# Altium PCB mt-kugreen-01.PcbDoc (part 2 of 2)
Units mm, origin at the board's own origin, x right, y up, seen from the top; angles counter-clockwise.
Board outline 84.8 x 48.4 mm, 2 copper layers (Top Layer, Bottom Layer); 75 components, 51 nets, 296 pads, 97 vias.
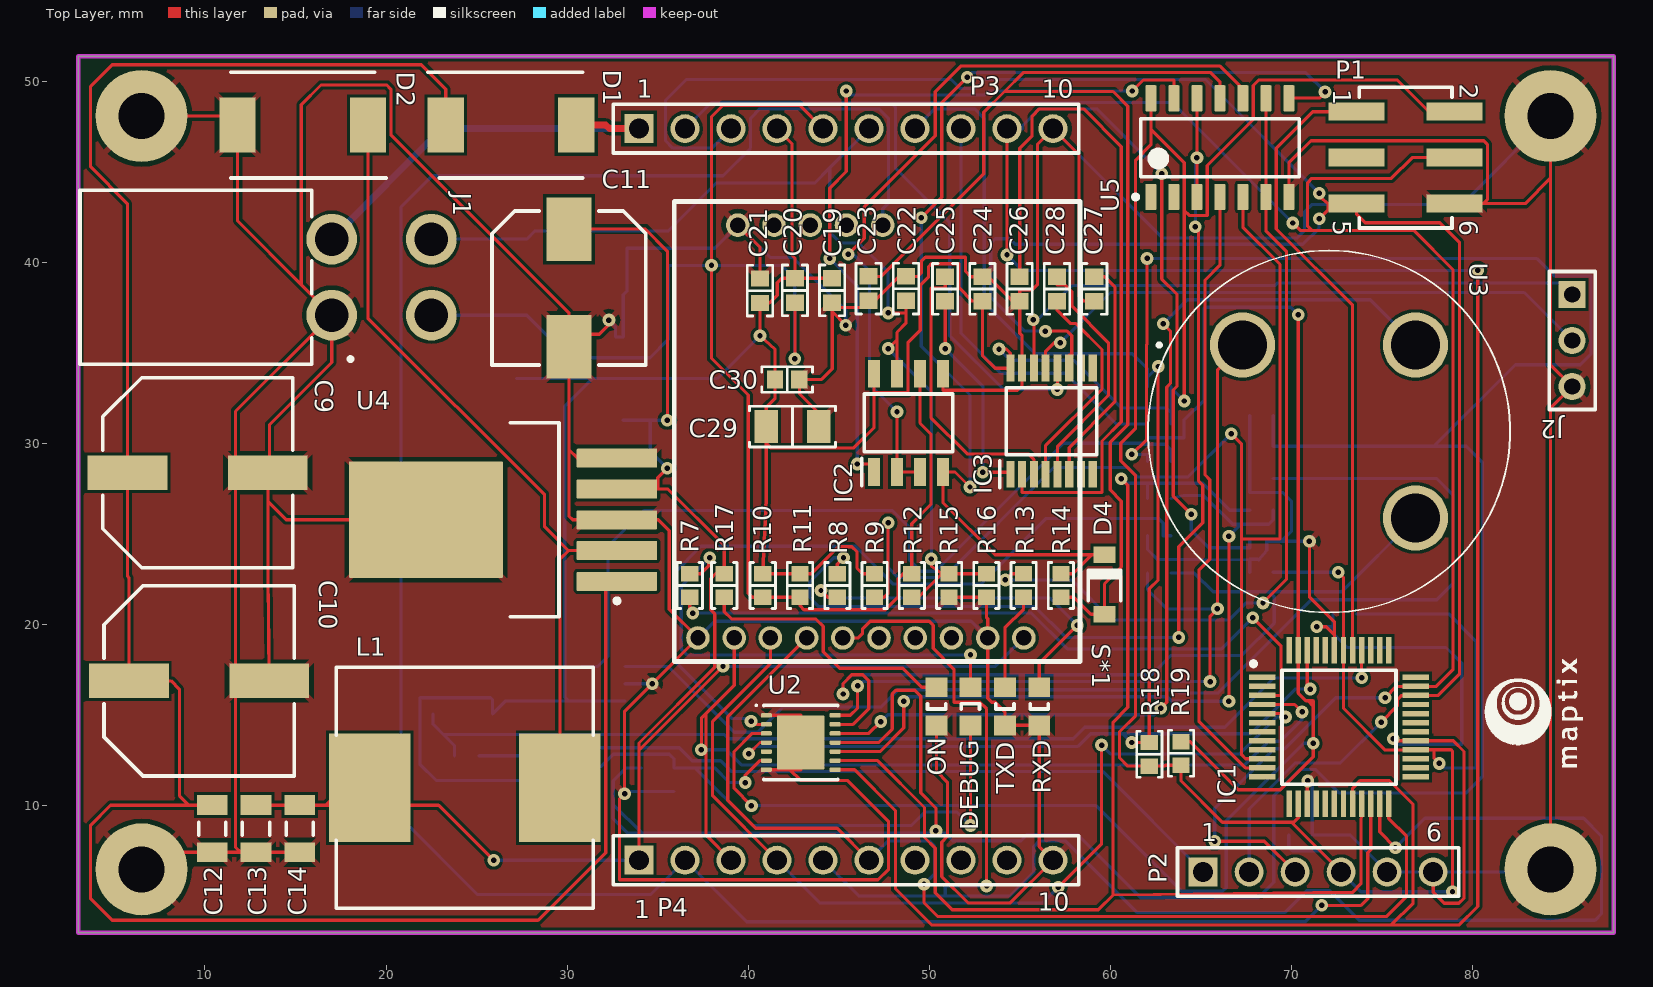
[diagram p0: Top Layer view]

## Via types
v1: diameter 0.7, hole 0.3, Top Layer to Bottom Layer, 97 vias

## Nets (pads, with @x,y where several pads share a name; then routed paths per layer and width w, separated by ;. In a path a pad name is that pad's centre, name@x,y a point inside that pad or via, vN(x,y) a via of type N, cw(c..) or ccw(c..) an arc to the next point about the centre after c; other vN are vias at no path point) (continued)
NetU2_12: (continued)
  Bottom Layer w0.178: v1(47.32,14.656) 47.701,15.037 62.433,15.037 v1(62.789,15.392) ; v1(62.916,36.627) 64.237,37.948 74.352,37.948 U3.2
RS232_RXD: IC3.14 J2.1 | length 33.5
  Top Layer w0.178: v1(55.744,36.852) 55.775,36.821 IC3.14
  Bottom Layer w0.178: v1(55.744,36.852) 55.977,36.852 57.86,38.735 69.081,38.735 69.215,38.869 84.871,38.869 J2.1
RS232_TXD: IC3.13 J2.2 | length 32.4
  Top Layer w0.178: IC3.13 56.425,35.114 56.896,35.585 v1(57.238,35.585)
  Bottom Layer w0.178: v1(57.238,35.585) 60.006,38.354 82.846,38.354 J2.2
SCL: IC1.47 P3.8 R2.1 R19.2 U2.3 | length 118.2
  Top Layer w0.178: v1(40.178,10.015) 39.22,10.973 39.22,13.005 40.215,14 U2.3 ; R19.2 64.414,13.55 67.068,10.897 69.393,10.897 71.203,12.707 v1(71.203,13.456) 71.203,15.512 ; v1(70.375,37.118) IC1.47 70.375,16.228 70.797,15.806 ; 70.797,15.806 70.804,15.799 70.917,15.799 71.203,15.512 ; 70.797,15.806 71.196,15.806 71.203,15.799 71.203,15.512
  Bottom Layer w0.178: v1(40.178,10.015) 59.208,10.015 63.94,5.283 66.192,5.283 66.396,5.486 66.396,9.173 70.679,13.456 v1(71.203,13.456) ; P3.8 51.75,36.101 53.957,33.895 57.51,33.895 60.317,31.088 R2.1 62.05,30.335 64.059,30.335 64.059,31.293 65.176,32.41 65.176,37.49 65.227,37.541 69.952,37.541 v1(70.375,37.118)
SDA: IC1.46 P3.7 R3.1 R18.2 U2.4 | length 85.5
  Top Layer w0.178: v1(40.03,12.878) 40.653,13.5 U2.4 ; v1(61.176,13.5) R18.2 62.15,21.988 62.636,22.475 v1(62.636,34.265) ; IC1.46 70.875,16.607 v1(71.03,16.453)
  Bottom Layer w0.178: v1(40.03,12.878) 40.437,13.284 58.215,13.284 58.916,13.985 60.691,13.985 ; P3.7 50.299,48.489 52.502,48.489 53.035,47.955 53.035,37.788 55.855,34.969 61.219,34.969 62.05,34.138 62.05,33.678 ; v1(61.176,13.5) 60.691,13.985 ; R3.1 62.05,33.678 ; v1(62.636,34.265) 62.05,33.678 ; v1(71.03,16.453) 70.21,16.453 67.743,13.985 60.691,13.985
UART485_RX: IC1.11 U5.4 | length 34.2
  Top Layer w0.178: U5.4 66.05,39.861 65.227,39.039 65.227,28.286 65.494,28.019 65.494,23.614 64.89,23.01 64.89,14.67 67.459,12.1 IC1.11
UART485_TX: IC1.10 R9.1 U5.5 | length 71.2
  Top Layer w0.178: R9.1 47.506,21.522 47.727,21.742 v1(47.727,25.629) ; v1(66.675,30.556) 67.234,29.997 67.234,24.74 ; U5.5 67.32,41.951 69.367,39.903 69.367,24.74 67.234,24.74 ; IC1.10 67.462,12.6 67.246,12.817 67.246,12.829 67.234,12.829 67.234,24.74
  Bottom Layer w0.178: v1(47.727,25.629) 47.727,23.165 48.285,22.606 50.8,22.606 56.888,28.694 60.974,28.694 61.5,28.169 64.287,28.169 v1(66.675,30.556)
UART_DTR: C18.1 P2.1 | length 43
  Bottom Layer w0.178: C18.1 30.885,12.775 31.318,13.208 36.188,13.208 36.906,12.49 38.474,12.49 39.058,11.905 59.57,11.905 P2.1
UART_RXD: IC1.35 IC3.12 P1.4 P2.3 P3.2 | length 126.2
  Top Layer w0.178: v1(57.074,32.995) v1(57.074,32.995) IC3.12 ; v1(65.761,8.052) 68.503,8.052 P2.3 ; v1(70.079,42.189) 70.485,41.783 71.12,41.783 ; v1(75.17,15.977) 75.794,16.6 IC1.35 78.001,16.6 78.918,17.517 78.918,39.624 76.759,41.783 71.12,41.783 ; P1.4 76.661,45.8 75.514,44.653 71.12,44.653 70.891,44.425 70.891,42.012 71.12,41.783
  Bottom Layer w0.178: P3.2 37.954,48.844 47.879,48.844 ; v1(57.074,32.995) 54.102,32.995 51.13,35.966 51.13,42.215 48.133,45.212 48.133,48.59 47.879,48.844 ; v1(65.761,8.052) 65.761,9.872 69.043,13.155 69.619,13.155 72.441,15.977 v1(75.17,15.977) ; v1(70.079,42.189) 63.424,48.844 47.879,48.844
UART_TXD: IC1.34 IC3.11 P1.5 P2.2 P3.3 | length 128.1
  Top Layer w0.178: v1(56.413,36.22) 57.607,36.22 57.861,35.966 57.861,34.9 57.725,34.9 IC3.11 ; v1(71.526,42.418) 72.034,42.926 72.034,43.26 ; v1(71.526,43.84) 71.526,43.666 72.034,43.26 ; v1(74.955,14.63) 75.844,15.519 75.844,15.85 76.095,16.1 IC1.34 78.105,16.1 79.273,17.268 79.273,41.122 78.194,42.201 74.071,42.201 73.6,42.672 P1.5 72.034,43.26
  Bottom Layer w0.178: P3.3 37.98,46.33 35.839,46.33 35.433,46.736 35.433,48.971 36.576,50.114 51.206,50.114 51.703,49.617 52.538,49.617 53.035,50.114 65.253,50.114 v1(71.526,43.84) ; v1(56.413,36.22) 55.27,36.22 53.391,38.1 53.391,41.072 53.645,41.326 54.432,41.326 54.744,41.014 70.63,41.014 71.526,41.91 v1(71.526,42.418) ; P2.2 67.665,9.829 70.206,12.37 72.695,12.37 v1(74.955,14.63)
UPDI: IC1.41 P1.1 | length 34.8
  Top Layer w0.178: IC1.41 73.375,37.648 69.164,41.859 69.164,46.33 71.175,48.34 P1.1
VREF: C3.1 C4.2 C5.2 R1.1 U2.11 | length 163.8
  Top Layer w0.178: U2.11 47.213,13.5 47.955,14.242 47.955,16.187 48.158,16.39 49.2,16.39 49.53,16.06 49.53,10.719 50.368,9.881 v1(50.368,8.636) ; v1(61.189,29.413) 62.001,30.226 62.001,35.484 62.027,35.509 v1(62.027,40.234)
  Bottom Layer w0.178: C5.2 33.276,12.1 ; v1(50.368,8.636) v1@50.216,8.484 ; v1(61.189,29.413) 62.05,29.413 R1.1 ; v1(62.027,40.234) 83.541,40.234 84.506,39.268 86.538,39.268 86.538,34.95 85.954,34.366 82.372,34.366 77.862,29.856 ; C4.2 C3.1 77.862,29.856 ; 33.276,12.1 33.258,12.1 32.537,11.379 32.537,9.296 33.35,8.484 34.138,8.484 ; 33.276,12.1 32.556,11.379 32.556,10.066 34.138,8.484 ; 34.138,8.484 v1@50.216,8.484 ; v1@50.216,8.484 50.876,8.484 51.283,8.077 55.063,8.077 55.408,8.422 58.177,8.422 61.671,4.928 68.174,4.928 69.028,5.782 69.028,10.557 70.485,12.014 71.323,12.014 72.619,10.719 79.654,10.719 80.543,11.608 80.543,28.967 79.654,29.856 77.862,29.856
pads on no net: IC1.1 IC1.2 IC1.6 IC1.7 IC1.8 IC1.9 IC1.12 IC1.13 IC1.16 IC1.17 IC1.18 IC1.19 IC1.25 IC1.26 IC1.27 IC1.30 IC1.31 IC1.32 IC1.33 IC1.36 IC1.37 IC1.38 IC1.39 IC1.44 IC1.45 IC1.48 IC3.7 IC3.8 IC3.9 IC3.10 P1.3 P4.7 P4.8 P4.9 S*1.2 S*1.3 S*1.4 S*1.11 S*1.12 S*1.13 U2.5 U5.1 U5.2

## Polygon pours and split planes (outlines as drawn)
GND on Top Layer "Top Layer-GND" (solid, pour order 0): 3,3 87.8,3 87.8,51.4 3,51.4
GND on Bottom Layer "Bottom Layer-GND" (solid, pour order 1): 3,3 87.8,3 87.8,51.4 3,51.4

## Keep-outs
Keep-Out Layer:
  the board outline again, w0.254

## Silkscreen, mask and mechanical layers (free items; w line width, h text height)
Top Overlay:
  drawing of 10 lines, arcs and shapes, not listed

## Dimensions
87.8,51.4 to 87.8,3 on Top Overlay
3,51.4 to 87.8,51.4 on Top Overlay

## Text inside footprints (layer, text, board x,y; h text height)
P1: Top Overlay "6" at 79.3,42.33 h1.02 r270; Top Overlay "5" at 72.3,42.33 h1.02 r270; Top Overlay "2" at 79.3,49.87 h1.02 r270; Top Overlay "1" at 72.3,49.57 h1.02 r270
P2: Top Overlay "1" at 65.005,8.05 h1.02; Top Overlay "6" at 77.445,8.05 h1.02
P3: Top Overlay "10" at 56.2,49.1 h1.02; Top Overlay "1" at 33.85,49.1 h1.02
P4: Top Overlay "1" at 33.7,3.8 h1.02; Top Overlay "10" at 56,4.2 h1.02